# Altium PCB PCB1.PcbDoc
Units mil, origin at the board's own origin, x right, y up, seen from the top; angles counter-clockwise.
Board outline 2401.37 x 2401.37 mil, 2 copper layers (Top Layer, Bottom Layer); 25 components, 9 nets, 53 pads, 0 vias.
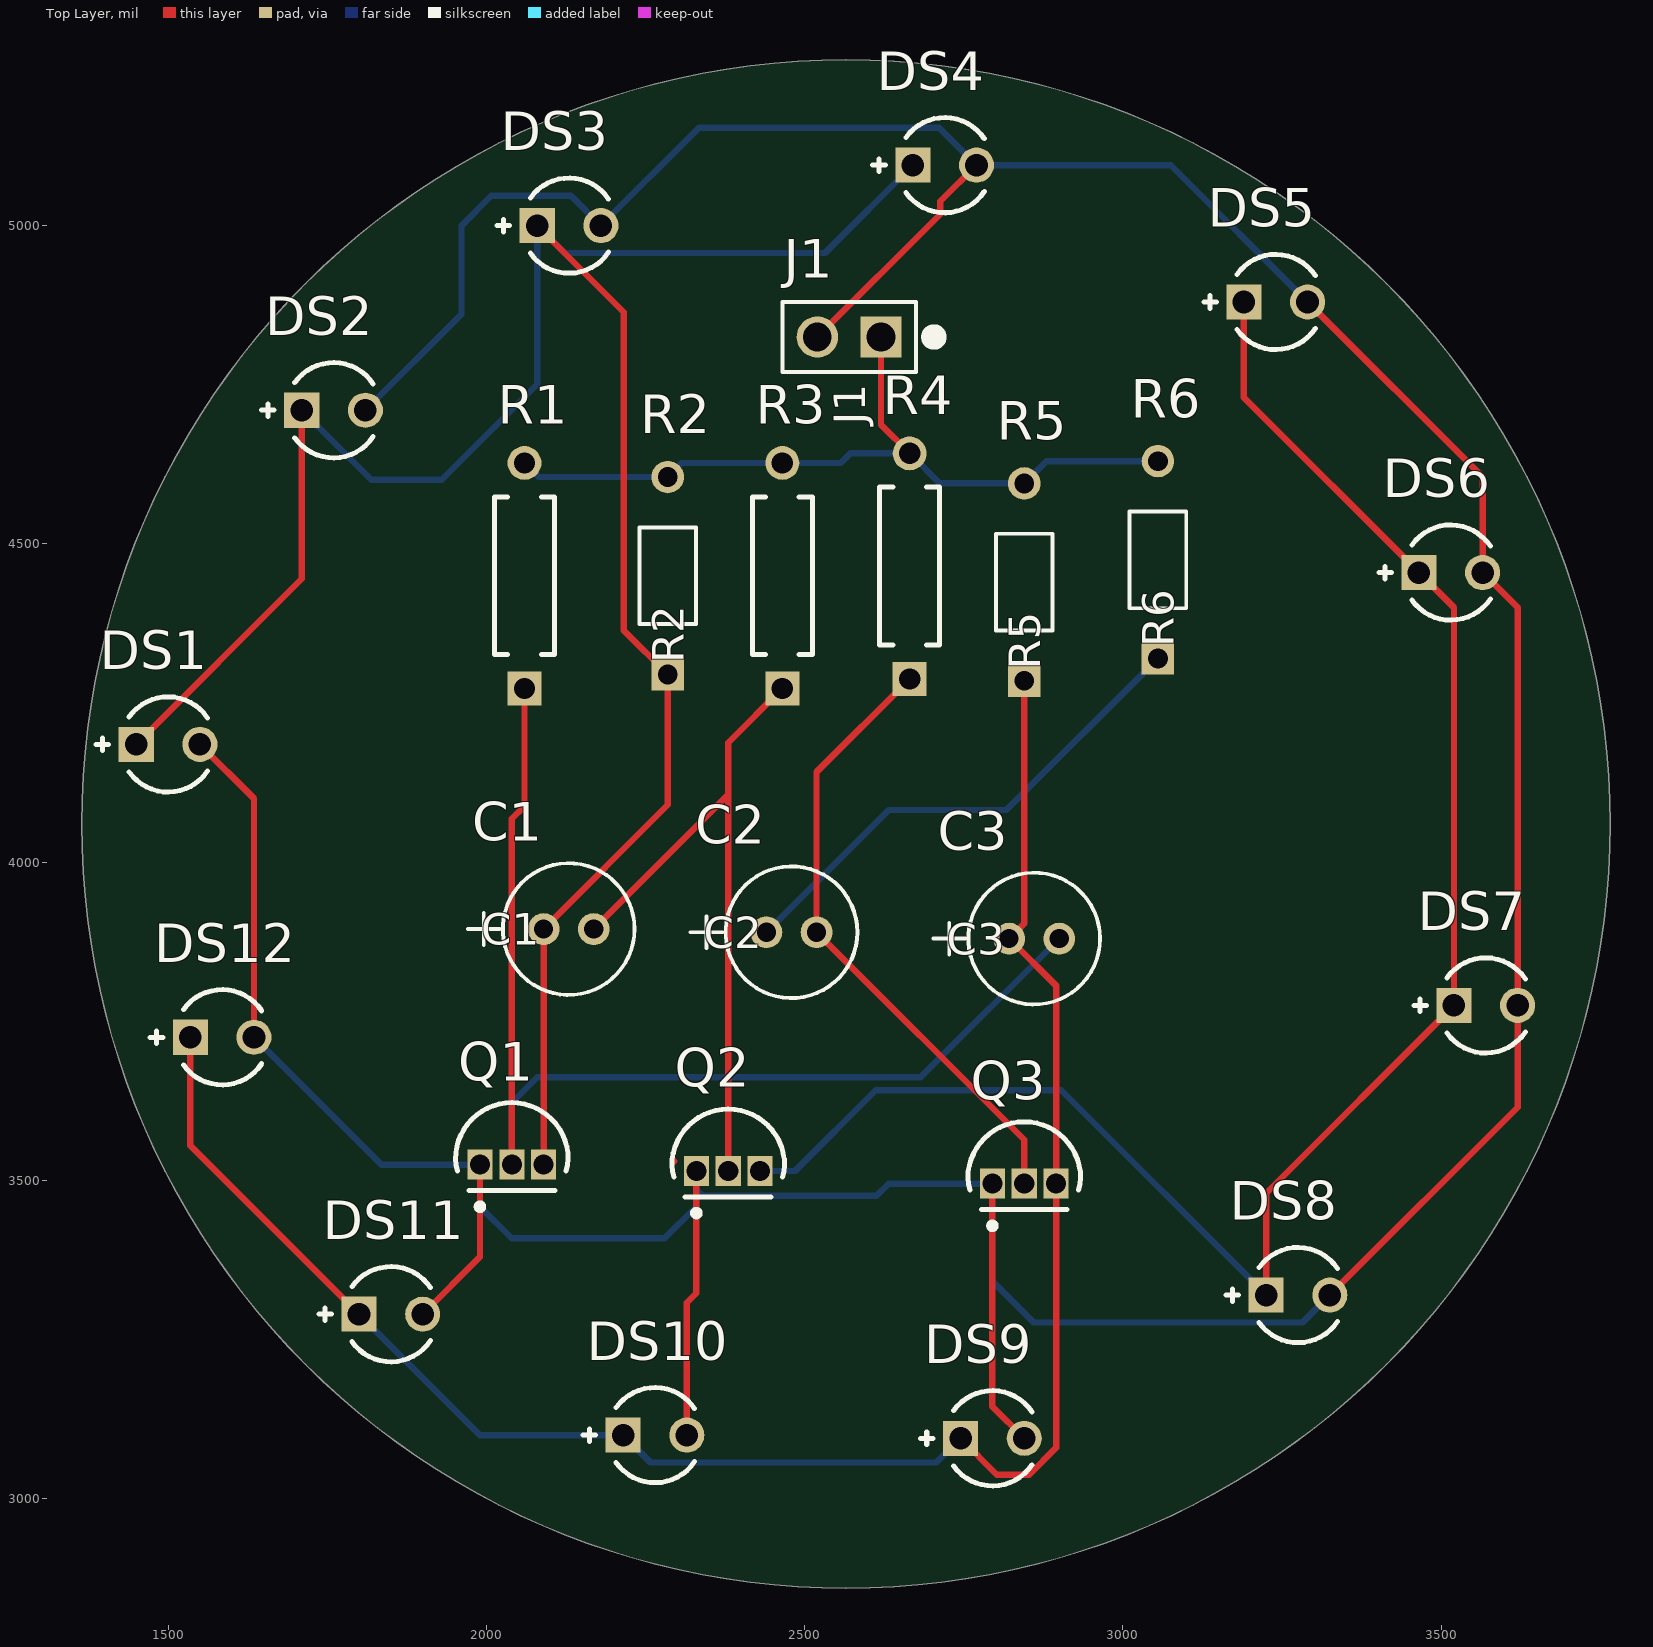
[diagram p0: Top Layer view]
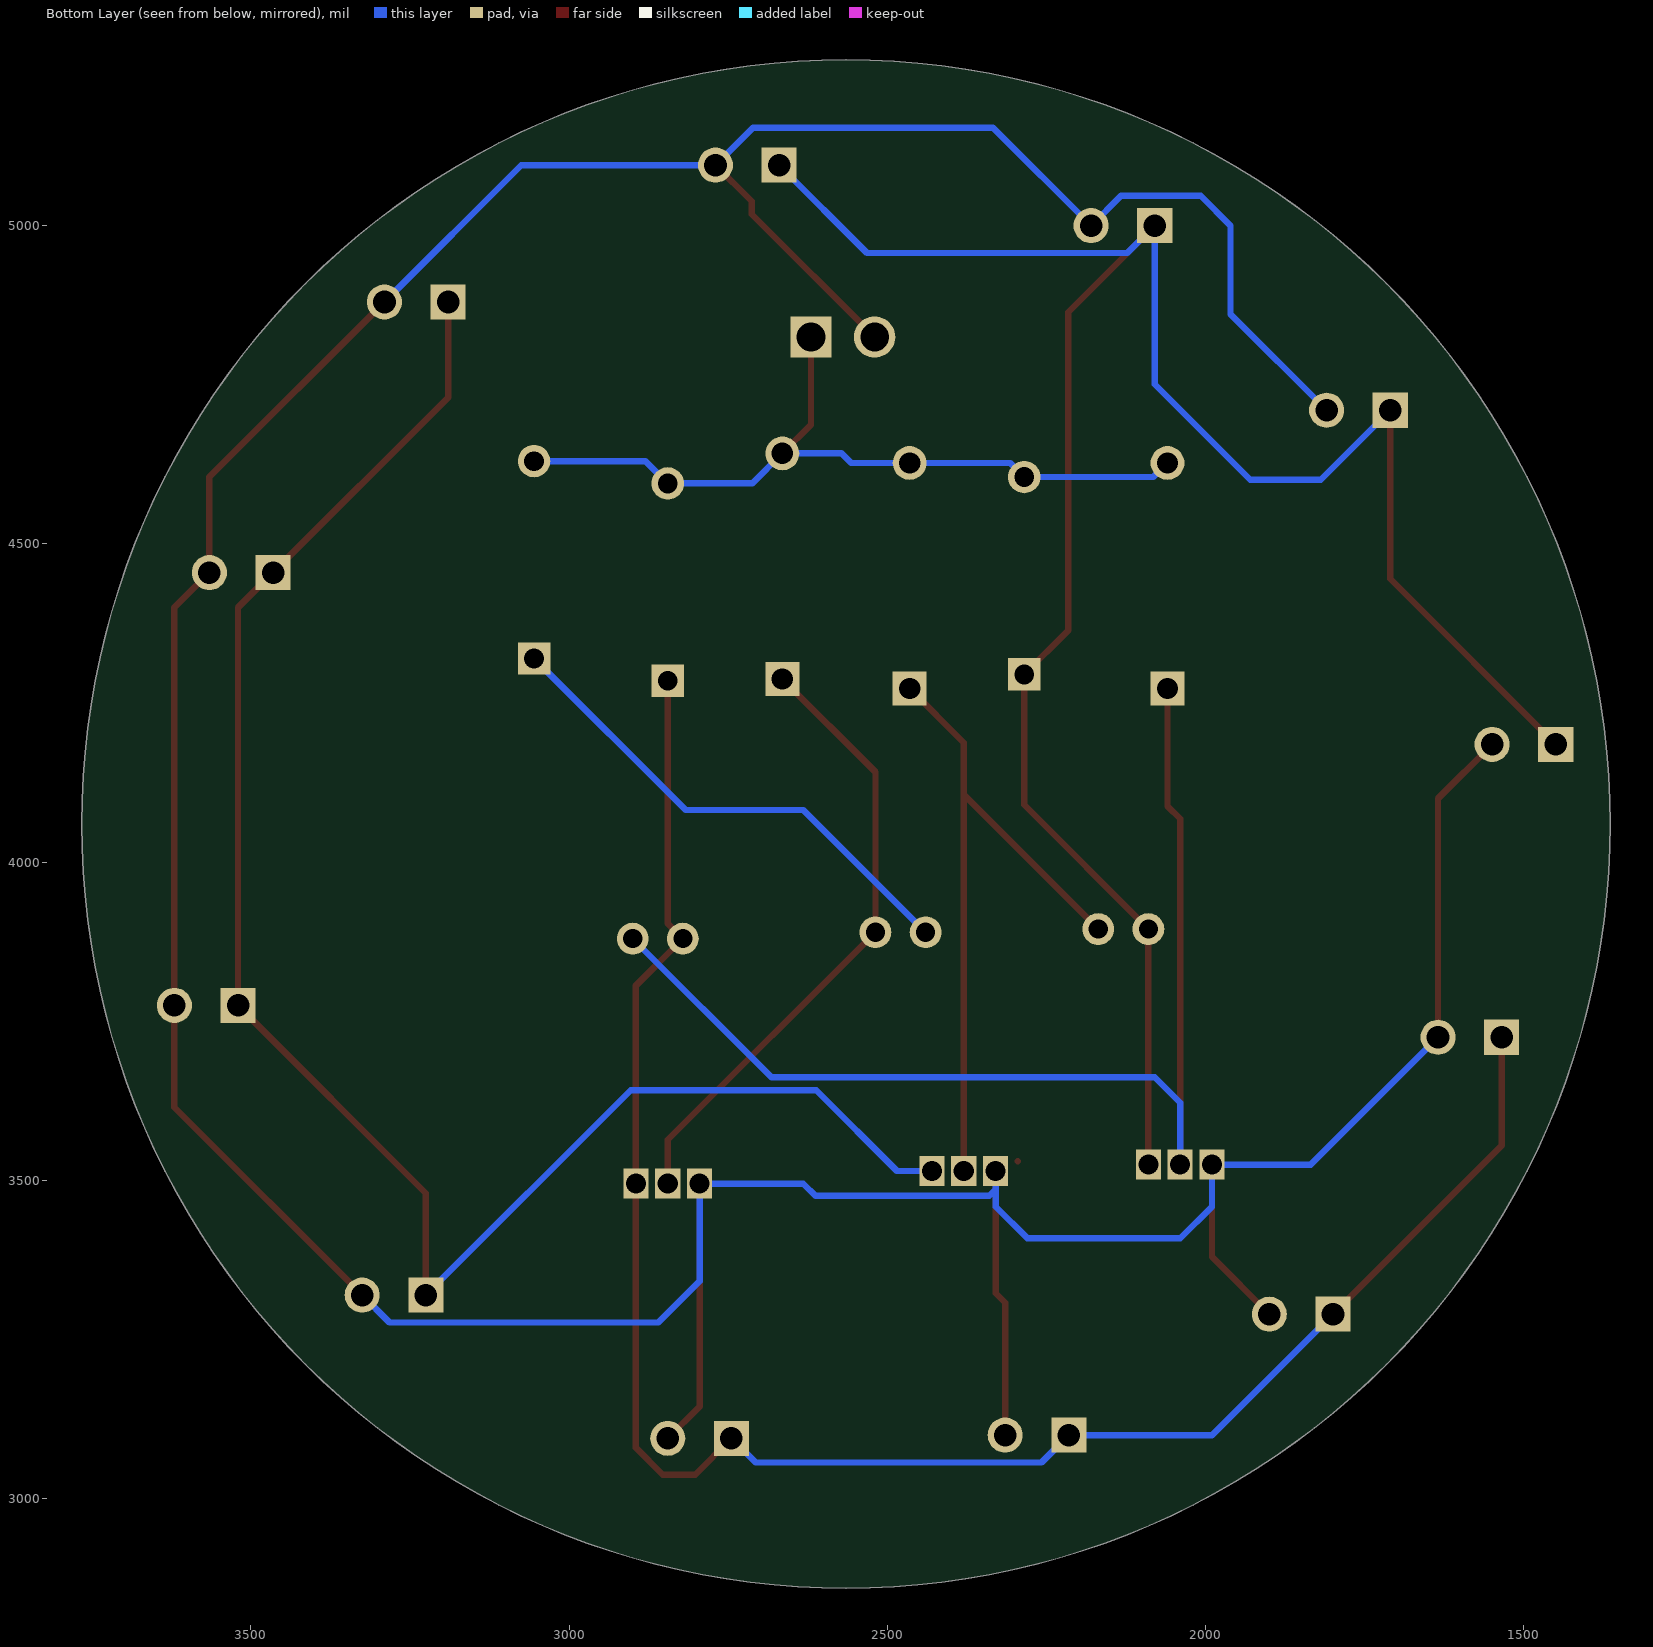
[diagram p1: Bottom Layer view, seen from below]

## Layer stack, top to bottom
Top Solder: solder mask 0.4, Solder Resist, Dk 3.5
Top Layer: signal copper 1.4
Dielectric 1: dielectric 12.6, FR-4, Dk 4.8
Bottom Layer: signal copper 1.4
Bottom Solder: solder mask 0.4, Solder Resist, Dk 3.5

## Board outline
2565,2859.32 cw(c2565,4060) 1364.32,4060 cw(c2565,4060) 2565,5260.68 cw(c2565,4060) 3765.68,4060 cw(c2565,4060)

## Design rules (kind name [scope] priority, off if disabled: settings)
Clearance [All] p1: gap=10 ignorepadtopadclearanceinfootprint=FALSE
PolygonConnect [All] p1: connectstyle=Relief reliefconductorwidth=10 reliefentries=4 polygonreliefangle="90 Angle" airgapwidth=10
RoutingVias [All] p1: holewidth=28 width=50 viastyle="Through Hole" minholewidth=28 minwidth=50 maxholewidth=28 maxwidth=50
SolderMaskExpansion [All] p1: expansion=0 istentingtop=FALSE
SupplyNets "Schematic Supply Nets" [InNet('GND')] p1: voltage=0.000
Width [All] p1: maxlimit=10 minlimit=10 preferedwidth=10
30 further rules are at their usual default settings.

## Components (designator, comment, footprint, x,y, rotation, side; value= is the part's Value field where it differs from the comment)
C1 "UVR1H220MDD1TA" CAP_UEP_5X11_NCH 2090,3895 r0 top
C2 "UVR1H220MDD1TA" CAP_UEP_5X11_NCH 2440,3890 r0 top
C3 "UVR1H220MDD1TA" CAP_UEP_5X11_NCH 2821.26,3880 r0 top
DS1 "LTL-1CHE" INDPR60-254-520X380X650 1500,4185 r0 top
DS2 "LTL-1CHE" INDPR60-254-520X380X650 1760,4710 r0 top
DS3 "LTL-1CHE" INDPR60-254-520X380X650 2130,5000 r0 top
DS4 "LTL-1CHE" INDPR60-254-520X380X650 2720,5095 r0 top
DS5 "LTL-1CHE" INDPR60-254-520X380X650 3240,4880 r0 top
DS6 "LTL-1CHE" INDPR60-254-520X380X650 3515,4455 r0 top
DS7 "LTL-1CHE" INDPR60-254-520X380X650 3570,3775 r0 top
DS8 "LTL-1CHE" INDPR60-254-520X380X650 3275,3320 r0 top
DS9 "LTL-1CHE" INDPR60-254-520X380X650 2795,3095 r0 top
DS10 "LTL-1CHE" INDPR60-254-520X380X650 2265,3100 r0 top
DS11 "LTL-1CHE" INDPR60-254-520X380X650 1850,3290 r0 top
DS12 "LTL-1CHE" INDPR60-254-520X380X650 1585,3725 r0 top
J1 "TSW-101-07-L-D" TSW-101-07-G-D_SAI 2620,4825 r90 top
Q1 "S9013" JSCJ-TO-92-3_V 2040,3525 r0 top
Q2 "S9013" JSCJ-TO-92-3_V 2380,3515 r0 top
Q3 "S9013" JSCJ-TO-92-3_V 2845,3495 r0 top
R1 "MFR-25FBF52-10K" RESA60-630X240 2060,4450 r90 top value=10k
R2 "CF18JT330R" STA_CF18_STP 2285,4295 r90 top
R3 "MFR-25FBF52-10K" RESA60-630X240 2465,4450 r90 top value=10k
R4 "MFR-25FBF52-10K" RESA60-630X240 2665,4465 r90 top value=10k
R5 "CF18JT330R" STA_CF18_STP 2845,4285 r90 top
R6 "CF18JT330R" STA_CF18_STP 3055,4320 r90 top

## Footprints (in the part's own frame and the unit in brackets; to place one, negate y for a bottom-side part, rotate by r counter-clockwise, add the part's x,y. Pads: shape width x height; smd on the part's side, far side on the other; paste and mask are expansions set on the pad)
CAP_UEP_5X11_NCH [mil]
  round 50 hole 30 paste-99999 mask+0: 1(0,0) 2(78.74,0)
  silkscreen extent -119,-103 143,103, body extent -59,-98 139,98, height 493
INDPR60-254-520X380X650 [mm] "THD, 2-Leads, Dia 3.8mm, Pitch 2.54mm"
  rect 1.4x1.4 hole 0.9: 1(-1.27,0)
  round 1.4 hole 0.9: 2(1.27,0)
  silkscreen extent -2.87,-1.9 1.58,1.9, body extent -1.9,-1.9 1.9,1.9, height 6.5
JSCJ-TO-92-3_V [mm] "TO-92, 3-leads, Height 4.7mm, Pitch 1.27mm"
  rect 1x1.2 hole 0.8: 1(-1.27,0) 2(0,0) 3(1.27,0)
  silkscreen extent -2.25,-1.81 2.25,2.47, body extent -2.25,-1.03 2.25,2.47, height 4.7
RESA60-630X240 [mm] "Axial Resistor, 2-Leads, Dia 2.4mm, Body Length 6.3mm"
  rect 1.35x1.35 hole 0.85: 1(-4.5,0)
  round 1.35 hole 0.85: 2(4.5,0)
  silkscreen extent -3.15,-1.2 3.15,1.2, body extent -4.77,-1.19 4.77,1.2, height 2.4
STA_CF18_STP [mil]
  rect 51x51 hole 31 paste-99999 mask+0: 1(0,0)
  round 51 hole 31 paste-99999 mask+0: 2(310,0)
  silkscreen extent 79,-44 231,45, body extent -11,-39 321,39, height 79
TSW-101-07-G-D_SAI [mil]
  rect 65x65 hole 45 paste-99999 mask+0: 1(0,0)
  round 65 hole 45 paste-99999 mask+0: 2(0,100)
  silkscreen extent -55,-93 55,155, body extent -50,-150 50,50, height 330

## Part data
C1 C2 C3: "No Description Available", Manufacturer_Name=Nichicon, Copyright="Copyright (C) 2026 Ultra Librarian. All rights reserved.", Manufacturer_Part_Number=UVR1H220MDD1TA
DS1 DS2 DS3 DS4 DS5 DS6 DS7 DS8 DS9 DS10 DS11 DS12: library part CMP-007-00018-2, "LED Uni-Color Red, 100 mW, 30 mA, -55 to 100 degC, 2-Pin THD, RoHS, Bulk", Case/Package=Radial, Colour=Red, Forward Current=20mA, Forward Voltage=2V, Manufacturer=Lite-On, Max Operating Temperature=100°C, Min Operating Temperature=-55°C, Package Description="2-Pin Through Hole Device, Dia 3.8 mm, Pitch 2.54 mm", Package Quantity=1000, Datasheet URL=https://datasheet.ciiva.com/15117/getdatasheetpartid-187746-15117985.pdf, Datasheet Version=Dec-03, Illumination Colour=Red, Lens Style=Dome, Luminous Intensity=12.6mcd, Manufacturer URL=http://www.us.liteon.com/, Mounting Technology=TH, Nominal Vf=2V, Package Reference=LTL-1CHE, Packaging=Bulk, Pins=2, RoHS Compliant=True, Viewing Angle=60degrees
J1: "Description", Manufacturer_Name="Samtec Inc", Copyright="Copyright (C) 2026 Ultra Librarian. All rights reserved.", Manufacturer_Part_Number=TSW-101-07-L-D, RefDes=RefDes, Type=Type
Q1 Q2 Q3: library part CMP-013-00000-3, "Transistor, NPN, 0.1 uA, 150 MHz, 3-Pin TO-92", Case/Package=TO-92-3, Manufacturer="Jiangsu Changjiang Electronics Technology", Package Description="3-Pin Through Hole Device, Height 4.7 mm, Pitch 2.3 mm", Datasheet URL=http://www.cj-elec.com/txUpfile/20121910315050632.pdf, Datasheet Version="Rev. B, 11/2011", Mounting Technology=TH, Package Reference=TO-92-3, RoHS Compliant=False
R1 R3 R4: library part CMP-009-00047-4, "Axial Resistor, 10 KOhm, +/- 1%, 0.25 W, -55 to 155 degC, 2-Pin THD, RoHS, Bulk", Case/Package=Axial, Manufacturer=Yageo, Max Operating Temperature=155°C, Min Operating Temperature=-55°C, Package Description="2-Pin Axial Lead, Dia 2.4 mm, Body Length 6.3 mm", Package Quantity=200, Package Reference=MFR-25, Power=250mW, Tolerance=1%, Voltage Rating=250V, Datasheet URL=http://www.yageo.com/documents/recent/Yageo%20LR_MFR_2013.pdf, Datasheet Version=Apr-13, Manufacturer URL=http://www.yageo.com/, Mounting Technology=TH, Packaging=Bulk, RoHS Compliant=True
R2 R5 R6: "Description", Manufacturer_Name="Stackpole International", Copyright="Copyright (C) 2025 Ultra Librarian. All rights reserved.", Manufacturer_Part_Number=CF18JT330R

## Nets (pads, with @x,y where several pads share a name; then routed paths per layer and width w, separated by ;. In a path a pad name is that pad's centre, name@x,y a point inside that pad or via, vN(x,y) a via of type N, cw(c..) or ccw(c..) an arc to the next point about the centre after c; other vN are vias at no path point)
GND: DS1.2 DS2.2 DS3.2 DS4.2 DS5.2 DS6.2 DS7.2 DS8.2 DS9.2 DS10.2 DS11.2 DS12.2 J1.2 Q1.1 Q2.1 Q3.1 | length 7845.6
  Top Layer w10: DS1.2 1635,4100 DS12.2 ; DS11.2 1990,3380 Q1.1 ; DS10.2 2315,3308 2330,3323 Q2.1 ; J1.2 2713,5018 2713,5038 DS4.2 ; Q3.1 2795,3145 DS9.2 ; DS5.2 3565,4605 DS6.2 3620,4400 DS7.2 3620,3615 DS8.2
  Bottom Layer w10: DS12.2 1835,3525 Q1.1 1990,3459 2040,3409 2280,3409 2330,3459 2330,3486 ; DS2.2 1961,4861 1961,5000 2008,5047 2133,5047 DS3.2 2334,5154 2711,5154 DS4.2 3075,5095 DS5.2 ; Q2.1 2330,3486 ; DS8.2 3282,3277 2860,3277 2795,3342 Q3.1 2632,3495 2613,3476 2340,3476 2330,3486
NetC1_1: C1.1 DS1.1 DS2.1 DS3.1 DS4.1 Q1.3 R2.1 | length 3664.6
  Top Layer w10: DS1.1 1710,4445 DS2.1 ; DS3.1 2216,4864 2216,4364 R2.1 2285,4090 C1.1 Q1.3
  Bottom Layer w10: DS2.1 1819,4601 1930,4601 2080,4751 DS3.1 2123,4957 2532,4957 DS4.1
NetC1_2: C1.2 Q2.2 R3.1 | length 1091.8
  Top Layer w10: C1.2 2380,4106.26 ; Q2.2 2380,4106.26 ; R3.1 2380,4187.83 2380,4106.26
NetC2_1: C2.1 R6.1 | length 793.1
  Bottom Layer w10: C2.1 2632,4082 2817,4082 R6.1
NetC2_2: C2.2 Q3.2 R4.1 | length 988.6
  Top Layer w10: R4.1 2518.74,4141.57 C2.2 2845,3563.74 Q3.2
NetC3_1: C3.1 DS9.1 DS10.1 DS11.1 DS12.1 Q3.3 R5.1 | length 3038.4
  Top Layer w10: DS12.1 1535,3555 DS11.1 ; DS9.1 2802,3038 2853,3038 2895,3080 Q3.3 2895,3806.26 C3.1 2845,3903.74 R5.1
  Bottom Layer w10: DS11.1 1990,3100 DS10.1 2258,3057 2707,3057 DS9.1
NetC3_2: C3.2 Q1.2 R1.1 | length 1820
  Top Layer w10: Q1.2 2040,4068 2060,4088 R1.1
  Bottom Layer w10: Q1.2 2040,3622 2080,3662 2682,3662 C3.2
NetDS5_1: DS5.1 DS6.1 DS7.1 DS8.1 Q2.3 | length 2799.9
  Top Layer w10: DS5.1 3190,4730 DS6.1 3520,4400 DS7.1 3225,3480 DS8.1
  Bottom Layer w10: Q2.3 2485,3515 2612,3642 2903,3642 DS8.1
NetJ1_1: J1.1 R1.2 R2.2 R3.2 R4.2 R5.2 R6.2 | length 1255.1
  Top Layer w10: J1.1 2620,4687.17 R4.2
  Bottom Layer w10: R1.2 2082.17,4605 R2.2 2307.17,4627.17 R3.2 2557,4627.17 2572,4642.17 R4.2 2712.17,4595 R5.2 2880,4630 R6.2
copper on no net: | length 0.3
  Top Layer w10: 2295,3530 2295.31,3530

## Silkscreen, mask and mechanical layers (free items; w line width, h text height)
Mechanical 1:
  circle w10: c2565,4060 r1200.68